# Altium PCB water_quality.PcbDoc
Units mm, origin at the board's own origin, x right, y up, seen from the top; angles counter-clockwise.
Board outline 120 x 100 mm, 2 copper layers (Top Layer, Bottom Layer); 15 components, 11 nets, 74 pads, 0 vias.
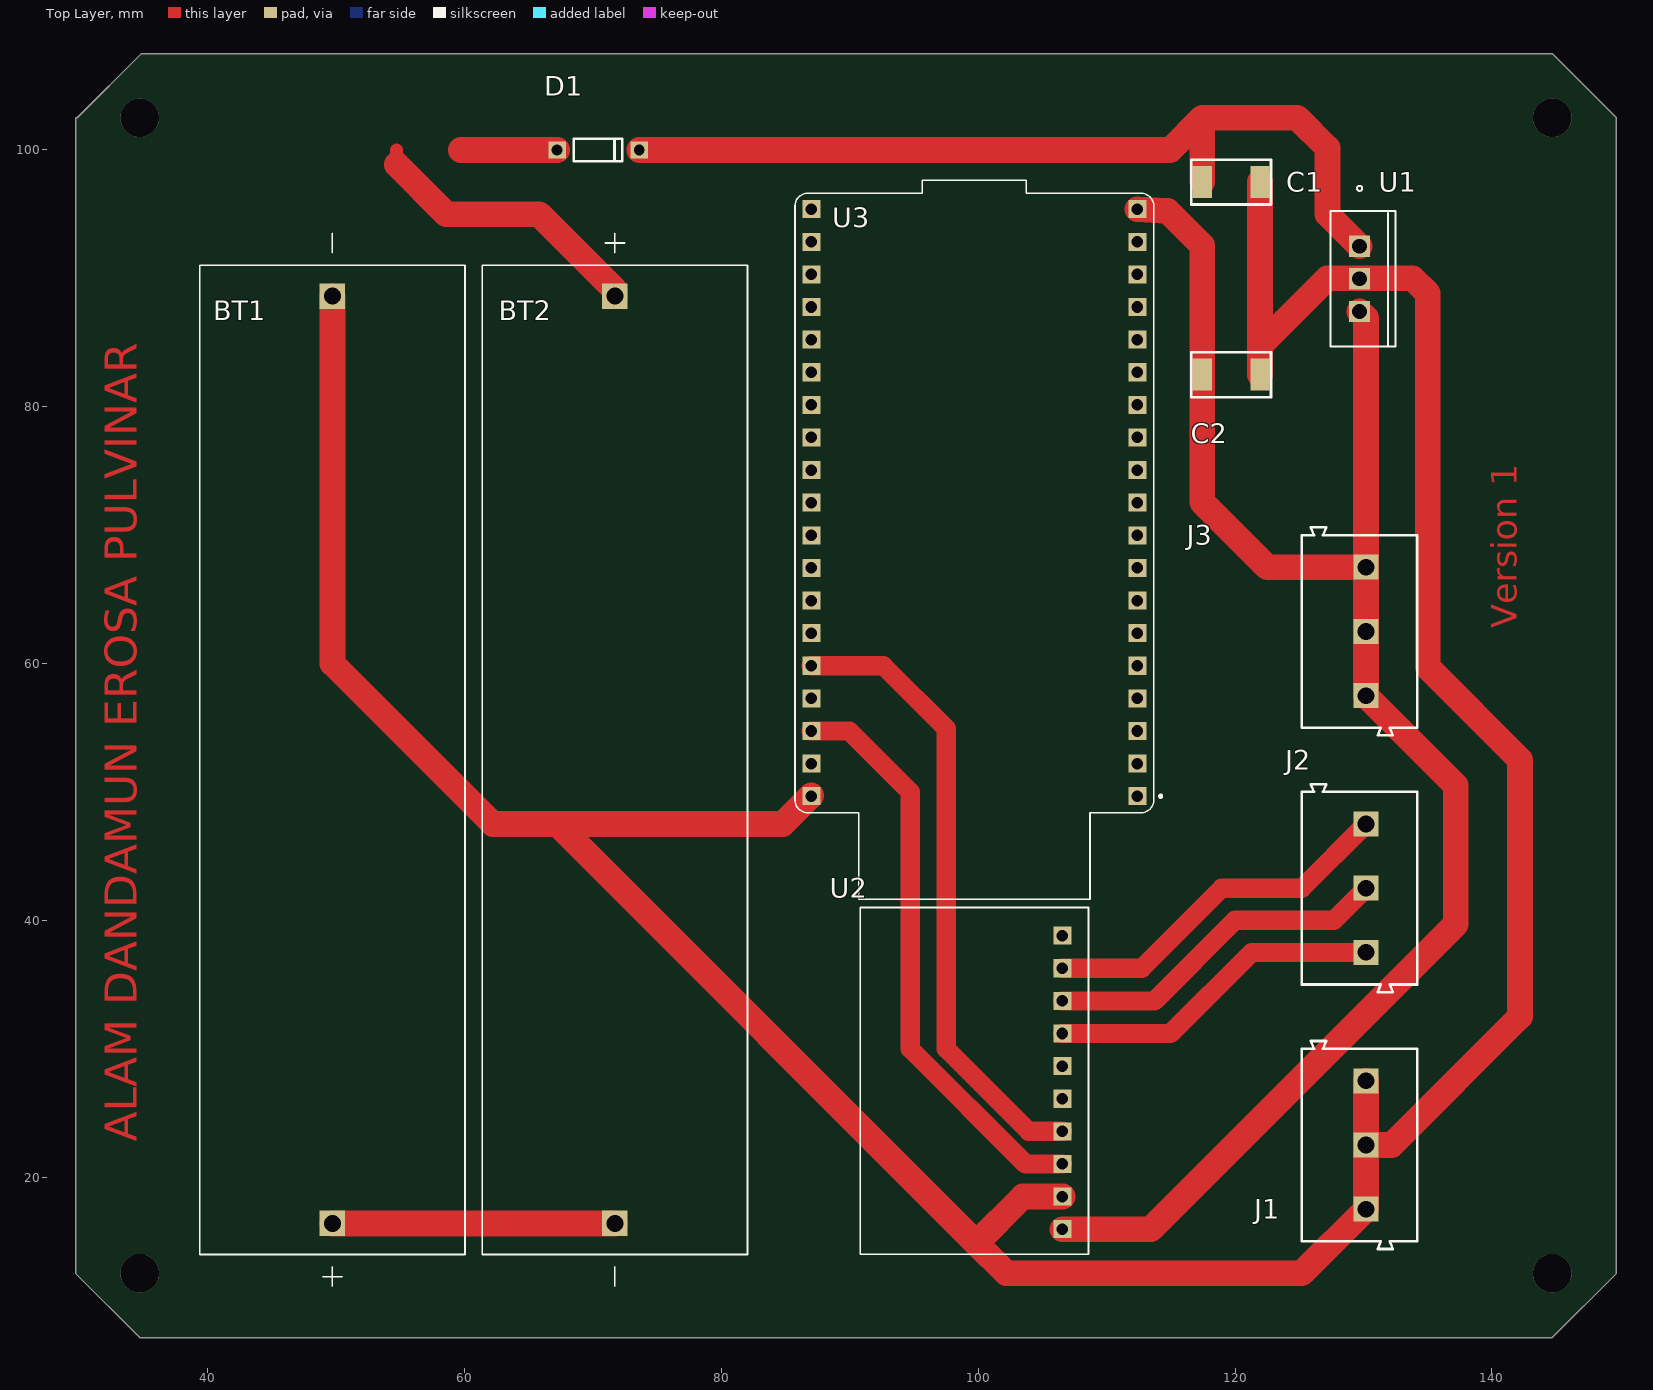
[diagram p0: Top Layer view]
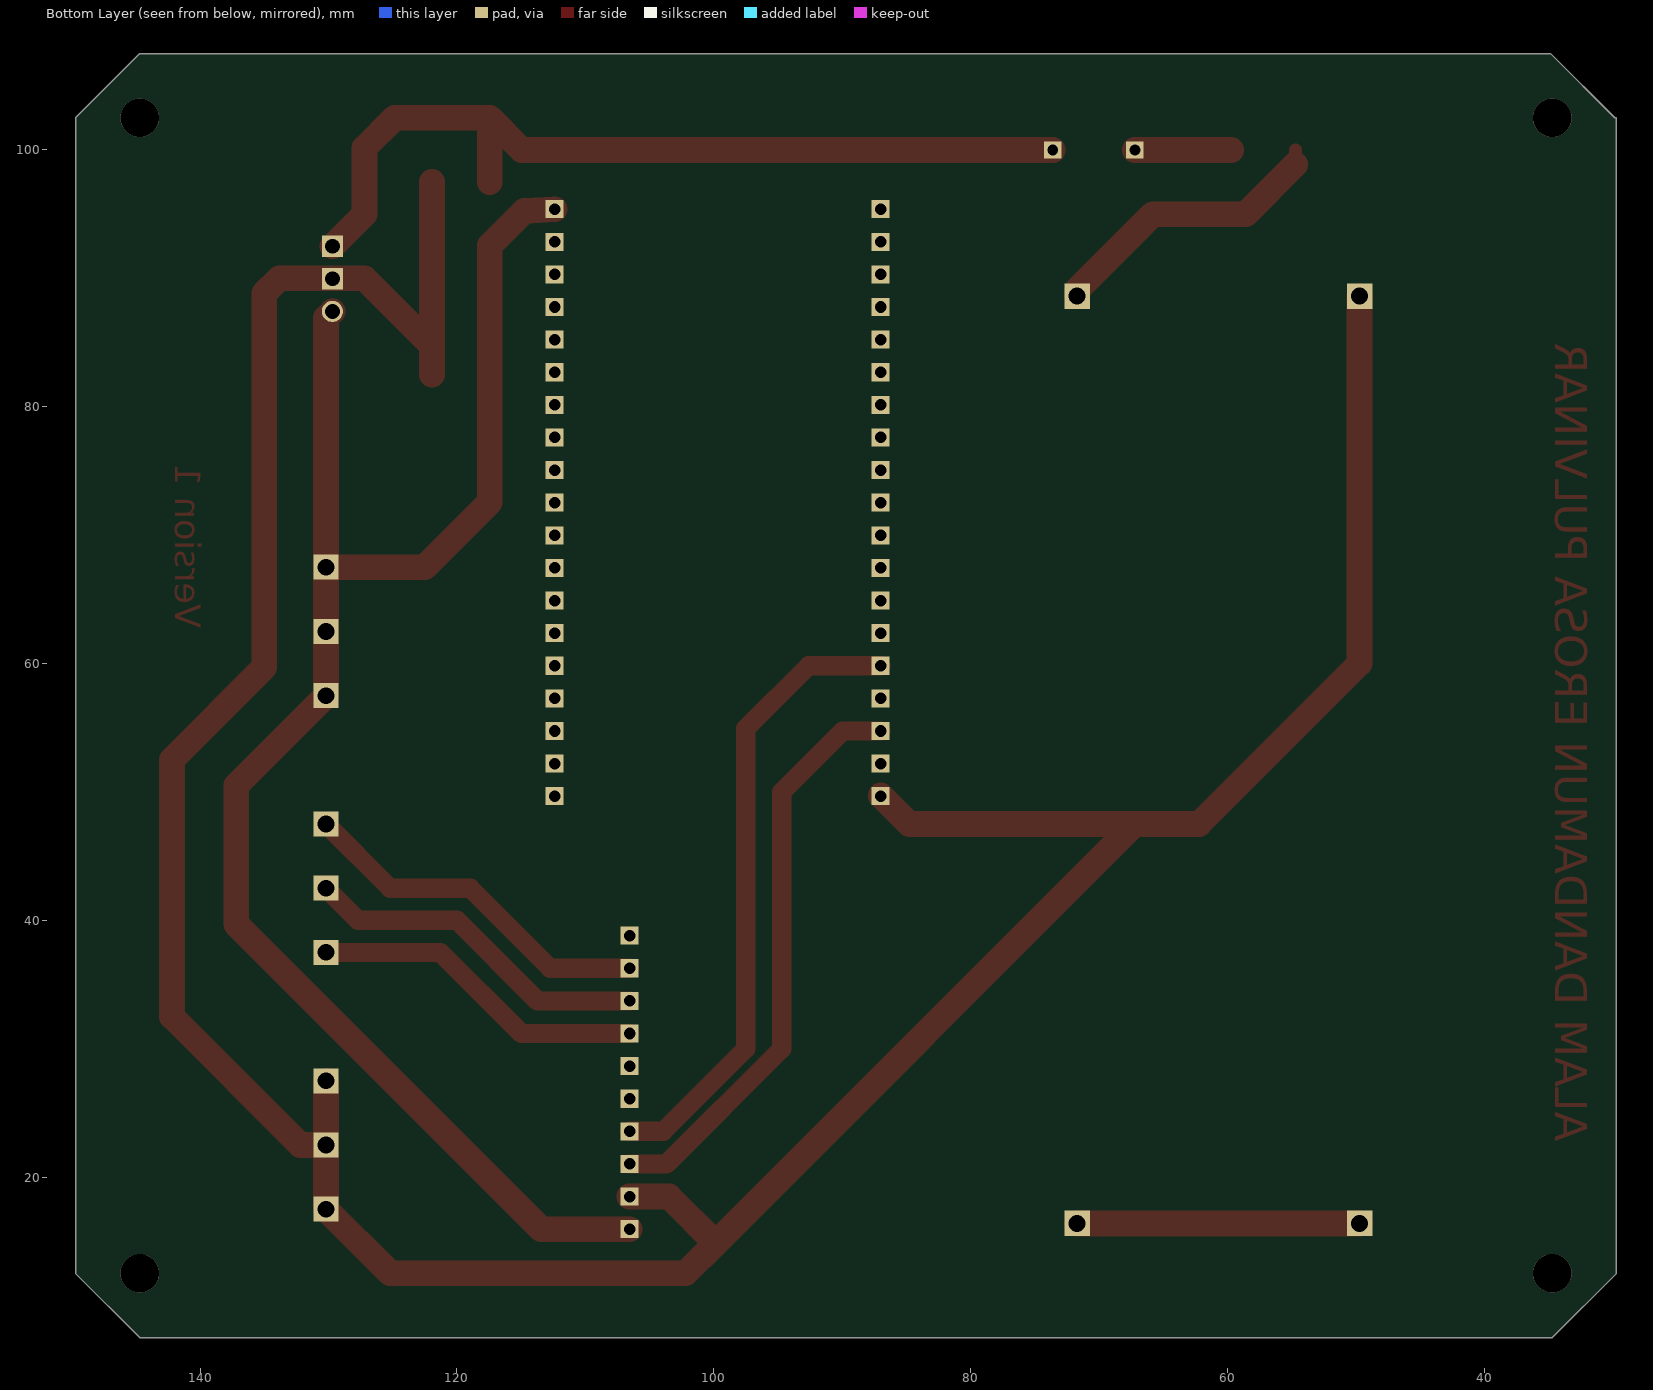
[diagram p1: Bottom Layer view, seen from below]
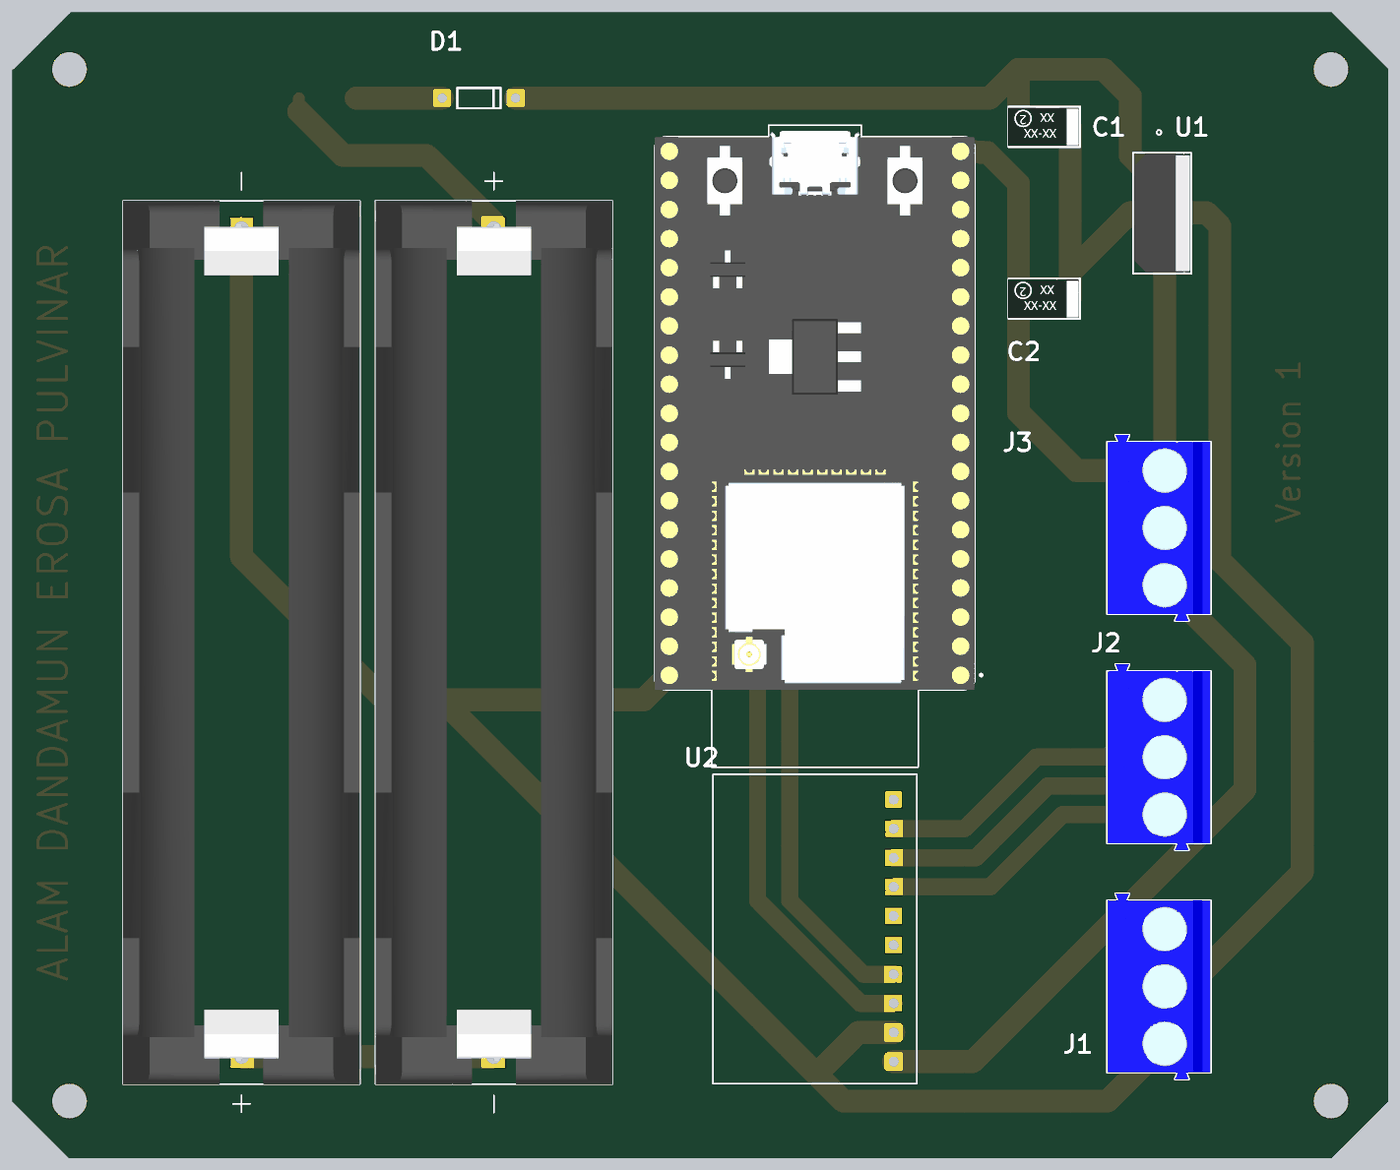
[diagram p2: 3D render of the assembled board from above, using the file's embedded part models]

## Layer stack, top to bottom
Top Solder: solder mask 0.0102, Solder Resist, Dk 3.5
Top Layer: signal copper 0.0356
Dielectric 1: dielectric 0.32, FR-4, Dk 4.8
Bottom Layer: signal copper 0.0356
Bottom Solder: solder mask 0.0102, Solder Resist, Dk 3.5

## Board outline
29.7,12.5 29.7,102.5 29.827,102.5 34.827,107.5 144.7,107.5 149.7,102.5 149.7,12.5 144.7,7.5 34.7,7.5

## Design rules (kind name [scope] priority, off if disabled: settings)
Clearance [All] p1: gap=0.254 ignorepadtopadclearanceinfootprint=FALSE
PolygonConnect [All] p1: connectstyle=Relief reliefconductorwidth=0.254 reliefentries=4 polygonreliefangle="90 Angle" airgapwidth=0.254
RoutingVias [All] p1: holewidth=0.711 width=1.27 viastyle="Through Hole" minholewidth=0.711 minwidth=1.27 maxholewidth=0.711 maxwidth=1.27
SolderMaskExpansion [All] p1: expansion=0.102 istentingtop=FALSE
SupplyNets "Schematic Supply Nets" [InNet('GND')] p1: voltage=0.000
Width [All] p1: maxlimit=2 minlimit=0.254 preferedwidth=1 toplayer_minwidth=0.5 bottomlayer_maxwidth=0.254 bottomlayer_prefwidth=0.254 minimp=50.000000 maximp=50.000000 favimp=50.000000
30 further rules are at their usual default settings.

## Classes and differential pairs
net class D1_Nets: NetC1_2 NetD1_1
net class U3_Nets: GND NetC2_2 NetU2_3 NetU2_4 NetU3_1 NetU3_2 NetU3_3 NetU3_4 NetU3_5 NetU3_6 NetU3_7 NetU3_8 NetU3_9 NetU3_10 NetU3_11 NetU3_12 NetU3_13 NetU3_14 NetU3_15 NetU3_16 NetU3_17 NetU3_18 NetU3_21 NetU3_23 NetU3_24 NetU3_26 NetU3_27 NetU3_28 NetU3_29 NetU3_30 NetU3_31 NetU3_32 NetU3_33 NetU3_34 NetU3_35 NetU3_36 NetU3_37 NetU3_38
net class U2_Nets: GND NetC2_2 NetJ2_1 NetJ2_2 NetJ2_3 NetU2_3 NetU2_4 NetU3_1 NetU3_2 NetU3_3 NetU3_4 NetU3_5 NetU3_6 NetU3_7 NetU3_8 NetU3_9 NetU3_10 NetU3_11 NetU3_12 NetU3_13 NetU3_14 NetU3_15 NetU3_16 NetU3_17 NetU3_18 NetU3_21 NetU3_23 NetU3_24 NetU3_26 NetU3_27 NetU3_28 NetU3_29 NetU3_30 NetU3_31 NetU3_32 NetU3_33 NetU3_34 NetU3_35 NetU3_36 NetU3_37 NetU3_38
net class U1_Nets: GND NetC1_2 NetC2_2 NetU1_2
net class SW1_Nets: NetBT2_P NetD1_1
net class J1_Nets: GND
net class J2_Nets: NetJ2_1 NetJ2_2 NetJ2_3
net class J3_Nets: NetC2_2
net class C2_Nets: GND NetC2_2
net class C1_Nets: GND NetC1_2
net class BT2_Nets: NetBT1_P NetBT2_P
net class BT1_Nets: GND NetBT1_P
component class water_quality: BT1 BT2 C1 C2 D1 J1 J2 J3 U1 U2 U3

## Components (designator, comment, footprint, x,y, rotation, side; value= is the part's Value field where it differs from the comment)
BT1 "BATTERY" BATTERY_HOLDER_1043 49.7,52.5 r270 top locked
BT2 "BATTERY" BATTERY_HOLDER_1043 71.7,52.5 r90 top locked
C1 "10µF" 293D106X9025C2T 119.7,97.5 r180 top locked value=10uF
C2 "10µF" 293D106X9025C2T 119.7,82.5 r180 top locked value=10uF
D1 "DIODE" DIODE 70.4,100 r0 top
J1 "TERMINAL" SCREW_TERMINAL 129.7,22.5 r90 top locked
J2 "TERMINAL" SCREW_TERMINAL 129.7,42.5 r90 top
J3 "TERMINAL" SCREW_TERMINAL 129.7,62.5 r90 top
U1 "MC7805CTG" MC7805CTG 129.7,92.5 r270 top locked
U2 "ADS1115" ADS1115 99.7,27.5 r90 top locked
U3 "Microcontroller" ESP32_WROOM_32E 99.7,72.5 r180 top locked
? "Comment" HOLE_M3 34.7,12.5 r0 top
? "Comment" HOLE_M3 34.7,102.5 r0 top
? "Comment" HOLE_M3 144.7,12.5 r0 top
? "Comment" HOLE_M3 144.7,102.5 r0 top

## Footprints (in the part's own frame and the unit in brackets; to place one, negate y for a bottom-side part, rotate by r counter-clockwise, add the part's x,y. Pads: shape width x height; smd on the part's side, far side on the other; paste and mask are expansions set on the pad)
293D106X9025C2T [mm]
  rect 1.5x2.5 smd: 1(-2.25,0) 2(2.25,0)
  silkscreen extent -3.1,-1.75 3.1,1.75, body extent -3.05,-1.68 3.15,1.68, height 2.36
ADS1115 [mil]
  rect 55.43x55.43 hole 35.43: 1(-455,-270) 2(-355,-270) 3(-255,-270) 4(-155,-270) 5(-55,-270) 6(45,-270) 7(145,-270) 8(245,-270) 9(345,-270) 10(445,-270)
  silkscreen extent -531,-350 531,350
BATTERY_HOLDER_1043 [mm]
  rect 1.98x1.98 hole 1.32: N(-36.11,0) P(36.11,0)
  silkscreen extent -41,-10.33 41,10.33, body extent -38.53,-10.33 38.53,10.33, height 14.86
DIODE [mm] "THD, 2-Leads, Dia 1.765 mm, Body Length 3.775 mm"
  rect 1.35x1.35 hole 0.85: 1(-3.2,0) 2(3.2,0)
  silkscreen extent -1.89,-0.88 1.89,0.88, body extent -1.89,-0.88 1.89,0.88, height 1.76
ESP32_WROOM_32E [mm]
  rect 1.408x1.408 / inner round 1.408 / far side rect 1.408x1.408 hole 0.9: 1(-12.7,22.835)
  rect 1.408x1.408 hole 0.9: 2(-12.7,20.295) 3(-12.7,17.755) 4(-12.7,15.215) 5(-12.7,12.675) 6(-12.7,10.135) 7(-12.7,7.595) 8(-12.7,5.055) 9(-12.7,2.515) 10(-12.7,-0.025) 11(-12.7,-2.565) 12(-12.7,-5.105) 13(-12.7,-7.645) 14(-12.7,-10.185) 15(-12.7,-12.725) 16(-12.7,-15.265) 17(-12.7,-17.805) 18(-12.7,-20.345) 19(-12.7,-22.885) 20(12.7,22.835) 21(12.7,20.295) 22(12.7,17.755) 24(12.7,15.215) 25(12.7,12.675) 26(12.7,10.135) 27(12.7,7.595) 28(12.7,5.055) 29(12.7,2.515) 30(12.7,-0.025) 31(12.7,-2.565) 32(12.7,-5.105) 33(12.7,-7.645) 34(12.7,-10.185) 35(12.7,-12.725) 36(12.7,-15.265) 37(12.7,-17.805) 38(12.7,-20.345) 39(12.7,-22.885)
  silkscreen extent -14.6,-25.13 13.97,30.87, body extent -13.95,-24.62 13.95,24.13, height 7.85
HOLE_M3 [mm]
  round 3 hole 3: ""(0,0)
MC7805CTG [mil]
  rect 65x65 / inner round 60 / far side rect 65x65 hole 45 paste-99999 mask+0: 1(0,0) 2(100,0)
  rect 65x65 / inner round 60 / far side round 65 hole 45 paste-99999 mask+0: 3(200,0)
  silkscreen extent -185,-89 308,111, body extent -103,-84 303,106, height 972
SCREW_TERMINAL [mm] "5,00mm - modular - blue - Horizontal entry with pressure clamp - 12,6mm height - 03p"
  rect 1.95x1.95 hole 1.3 paste-2539.97: 1(-5,-0.5)
  rect 1.95x1.95 hole 1.3: 2(0,-0.5) 3(5,-0.5)
  silkscreen extent -8.1,-4.5 8.1,4.5, body extent -8.1,-4.5 8.1,4.5, height 12.65

## Part data
BT1 BT2: library part BATTERY_HOLDER_1043, "SMT Polarized Holder for 18650 Battery", Package=None, Availability="In Stock", Check_prices=https://www.snapeda.com/parts/1042P/Keystone+Electronics/view-part/?ref=eda, MF="Keystone Electronics", MP=1042P, Price=None, Purchase-URL=https://pricing.snapeda.com/search/part/1042P/?ref=eda, SnapEDA_Link=https://www.snapeda.com/parts/1042P/Keystone+Electronics/view-part/?ref=snap
C1 C2: library part 293D106X9025C2T, "Tantalum Capacitor, Polarized, Tantalum (dry/solid), 25V, 10% +Tol, 10% -Tol, 10uF, Surface Mount, 2312", Capacitor Type=Tantalum, Case/Package=2312, ESR (Equivalent Series Resistance)=1.5R, Leakage Current=2.5uA, Manufacturer=Vishay, Max Operating Temperature=125°C, Min Operating Temperature=-55°C, Package Shape=Rectangular, Package Style=SMTMeter, Rated DC Voltage (URdc)=25V, Ripple Current=270mA, Tolerance  (fill in as +-)=10%, Category="Tantalum Capacitors", ComponentLink1Description=https://datasheet.ciiva.com:443/pdfs/VipMasterIC/IC/VISH/VISHS28296/VISHS28296-1.pdf?src-supplier=IHS+Markit, ComponentLink1URL=https://datasheet.ciiva.com:443/pdfs/VipMasterIC/IC/VISH/VISHS28296/VISHS28296-1.pdf?src-supplier=IHS+Markit, ComponentLink2Description=https://datasheet.ciiva.com/12899/293d-239871-12899927.pdf?src-supplier=Mouser, ComponentLink2URL=https://datasheet.ciiva.com/12899/293d-239871-12899927.pdf?src-supplier=Mouser, ComponentLink3Description=https://datasheet.ciiva.com/16332/293d-16332437.pdf?src-supplier=Future+Electronics, ComponentLink3URL=https://datasheet.ciiva.com/16332/293d-16332437.pdf?src-supplier=Future+Electronics, Dielectric Material=Tantalum, Height=2.5mm, Length=6mm, Manufacturer Part Number=293D106X9025C2T, Mounting Technology="Surface Mount", Packaging="Tape and Reel", Pins=2, Polarity=Polarized, Pricing="500=0.2335, 1000=0.2312, 2000=0.2289, 2500=0.2266, 3000=0.2243, 4000=0.2221, 5000=0.2198, 10000=0.2176, 20000=0.2155 (USD)", RoHS=Yes, RoHS Compliant=Yes, Supplier="Arrow Electronics", Supplier Part Number=293D106X9025C2T, Tan Delta=0.06, Terminal Finish=Tin, Termination=Wraparound, Tolerance (fill in as +-)=10%, Width=3.2mm
D1: "Small Signal Schottky Diode, 150 mA, 100 V, -65 to 125 degC, 2-Pin DO-35, RoHS, Tape and Reel", Diode Case Style=DO-204AH, Forward Current If(AV)=150mA, Forward Surge Current Ifsm Max=750mA, Forward Voltage VF Max=1V, Manufacturer=STMicroelectronics, Operating Temperature Max=125°C, Package Description="2-Pin Axial Lead, Dia 1.765 mm, Body Length 3.775 mm", Package Reference=DO-35-2, Repetitive Reverse Voltage Vrrm Max=100V, Datasheet URL=http://www.st.com/content/ccc/resource/technical/document/datasheet/group1/11/76/e4/a3/df/07/49/14/CD00000767/files/CD00000767.pdf/jcr:content/translations/en.CD00000767.pdf, Datasheet Version="Rev. 2.1, 10/2001", Diode Configuration=Single, Diode Type=Schottky, Manufacturer URL=http://www.st.com/, Mounting Technology=ThroughHole, No. of Pins=2Pins, Packaging=Tape&Reel, Product Range=-, SVHC=NoSVHC(15-Jun-2015)
J1 J2 J3: library part SCREW_TERMINAL, "No Description Available", Mfr_Name="On Shore Technology", RefDes=RefDes, Type=Type
U1: "Positive Voltage Regulator, 1 A, 5 V, 0 to 125 degC, 3-Pin TO-220, RoHS, Tube", Current, Output, Maximum=1A, Current, Quiescent Supply=6.5mA, Current, Supply=3.2mA, Dropout Voltage=2V, Manufacturer="ON Semiconductor", Package Description="3-Pin Flange Mount, Vertical Straight Lead, Body 9.97 x 4.445 mm, Pitch 2.54 mm", Package Reference=TO-220-3-221AB-01, Package Type=TO-220, Package Version="Rev. A, 11/2010", Resistance, Thermal, Junction to Case=5degC/W, Temperature, Operating, Maximum=+125degC, Temperature, Operating, Minimum=0degC, Temperature, Operating, Range=0to+125degC, Voltage, Input Range=Maximumof35V, Voltage, Input, High Level=35V, Voltage, Noise=10μV/V, Voltage, Output=5V, Datasheet URL=http://www.onsemi.com/pub_link/Collateral/MC7800-D.PDF, Datasheet Version="Rev. 27, 11/2014", Dimensions=10.28x4.82x15.75mm, Dropout Voltage Measurement Current=1A, Height=15.75mm, Length=10.28mm, Line Regulation=20mV, Load Regulation=25mV, Manufacturer URL=http://www.onsemi.com/, Mounting Type=ThroughHole, Number of Outputs=1, Number of Pins=3, Output Type=Fixed, Polarity=Positive, Regulation, Line=0.5mV, Regulation, Load=1.3mV, Regulator Function=Standard, Regulator Type=PositiveVoltageOut, Type=VoltageRegulator, Voltage, Dropout=2V, Voltage, Supply=35V, Width=4.82mm
U2: Package=None, Availability=Unavailable, MF="{'manufacturer': u'Adafruit Industries LLC'}", MP=1085, Price=None
U3: library part ESP32_WROOM_32E, "ESP32-WROOM-32E Transceiver; 802.11 b/g/n (Wi-Fi, WiFi, WLAN), BluetoothÂ® Smart Ready 4.x Dual Mode 2.4GHz Evaluation Board", Package=None, Check_prices=https://www.snapeda.com/parts/ESP32-DEVKITC-32E/Espressif+Systems/view-part/?ref=eda, MF="Espressif Systems", MP=ESP32-DEVKITC-32E, SnapEDA_Link=https://www.snapeda.com/parts/ESP32-DEVKITC-32E/Espressif+Systems/view-part/?ref=snap

## Nets (pads, with @x,y where several pads share a name; then routed paths per layer and width w, separated by ;. In a path a pad name is that pad's centre, name@x,y a point inside that pad or via, vN(x,y) a via of type N, cw(c..) or ccw(c..) an arc to the next point about the centre after c; other vN are vias at no path point)
GND: BT1.N C1.1 C2.1 J1.1 J1.2 J1.3 U1.2 U2.2 U3.20 | length 276
  Top Layer w2: BT1.N 49.7,60 62.2,47.5 67.2,47.5 ; U3.20@87,49.72 84.78,47.5 67.2,47.5 ; U2.2 103.483,18.483 99.85,14.85 ; C2.1 121.95,84.75 ; C1.1 121.95,84.75 ; J1.3 J1.2 ; 67.2,47.5 99.85,14.85 ; 99.85,14.85 102.2,12.5 125.2,12.5 J1.1 J1.2 ; 121.95,84.75 127.2,90 129.7,90 133.828,90 135,88.829 135,59.7 142.2,52.5 142.2,32.5 132.2,22.5 J1.2
NetBT1_P: BT1.P BT2.N | length 22
  Top Layer w2: BT1.P BT2.N
NetBT2_P: BT2.P | length 22.7
  Top Layer w1: 54.7,98.86 54.7,100
  Top Layer w2: 54.7,98.86 58.56,95 65.81,95 71.7,89.11 BT2.P
NetC1_2: C1.2 D1.2 U1.1 | length 69.3
  Top Layer w2: D1.2 79.573,100 114.95,100 117.45,102.5 ; C1.2 117.45,102.5 ; U1.1 127.2,95 127.2,100.157 124.857,102.5 117.45,102.5
NetC2_2: C2.2 J3.1 J3.2 J3.3 U1.3 U2.1 U3.19 | length 132.3
  Top Layer w2: U2.1 113.443,15.943 137.2,39.7 137.2,50.5 J3.1 J3.2 J3.3 ; U3.19 114.758,95.242 116.864,93.136 117.45,92.55 C2.2 117.45,72.55 122.5,67.5 J3.3 ; U1.3 130.2,86.92 J3.3
NetD1_1: D1.1 | length 7.5
  Top Layer w2: 59.7,100 D1.1
NetJ2_1: J2.1 U2.7 | length 26.3
  Top Layer w1.5: U2.7 114.983,31.183 121.3,37.5 J2.1
NetJ2_2: J2.2 U2.8 | length 27.3
  Top Layer w1.5: U2.8 113.723,33.723 120,40 127.7,40 J2.2
NetJ2_3: J2.3 U2.9 | length 28.3
  Top Layer w1.5: U2.9 112.734,36.263 118.971,42.5 125.2,42.5 J2.3
NetU2_3: U2.3 U3.22 | length 45.2
  Top Layer w1.5: U3.22 89.955,54.745 94.7,50 94.7,30 103.677,21.023 U2.3
NetU2_4: U2.4 U3.25 | length 49.2
  Top Layer w1.5: U3.25 92.604,59.825 97.5,54.929 97.5,30 103.937,23.563 U2.4
pads on no net: ?. U2.5 U2.6 U2.10 U3.1 U3.2 U3.3 U3.4 U3.5 U3.6 U3.7 U3.8 U3.9 U3.10 U3.11 U3.12 U3.13 U3.14 U3.15 U3.16 U3.17 U3.18 U3.21 U3.24 U3.26 U3.27 U3.28 U3.29 U3.30 U3.31 U3.32 U3.33 U3.34 U3.35 U3.36 U3.37 U3.38 U3.39

## Other copper
Top Layer:
  text "Version 1" at 141.95,62.75 h2 r90
  text "ALAM DANDAMUN EROSA PULVINAR" at 34.45,22.75 h2.5 r90

## Silkscreen, mask and mechanical layers (free items; w line width, h text height)
Mechanical 1:
  lines w0.254: 29.7,102.5 29.7,12.5 34.7,7.5 144.7,7.5 149.7,12.5 149.7,102.5 144.7,107.5 34.7,107.5 ; 29.827,102.5 34.827,107.5